# Altium PCB ADC.PcbDoc
Units mil, origin at the board's own origin, x right, y up, seen from the top; angles counter-clockwise.
Board outline 6000 x 4000 mil, 2 copper layers (Top Layer, Bottom Layer); 14 components, 29 nets, 74 pads, 6 vias.
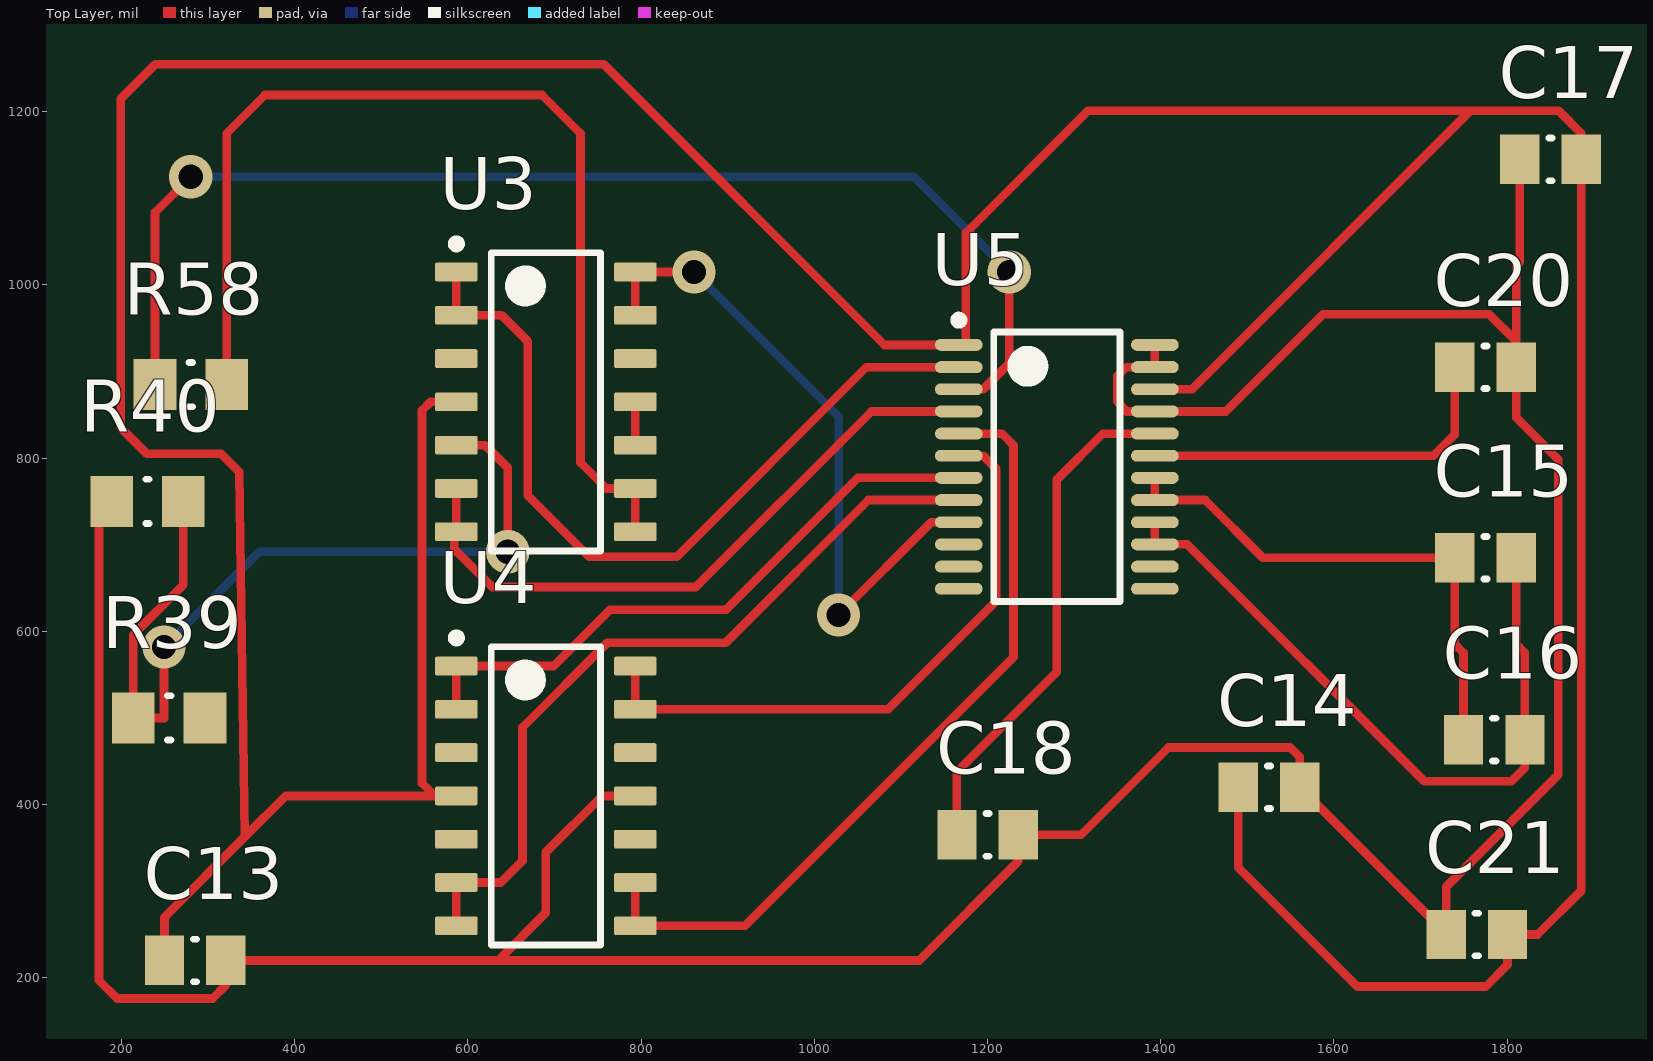
[diagram p0: Top Layer view]
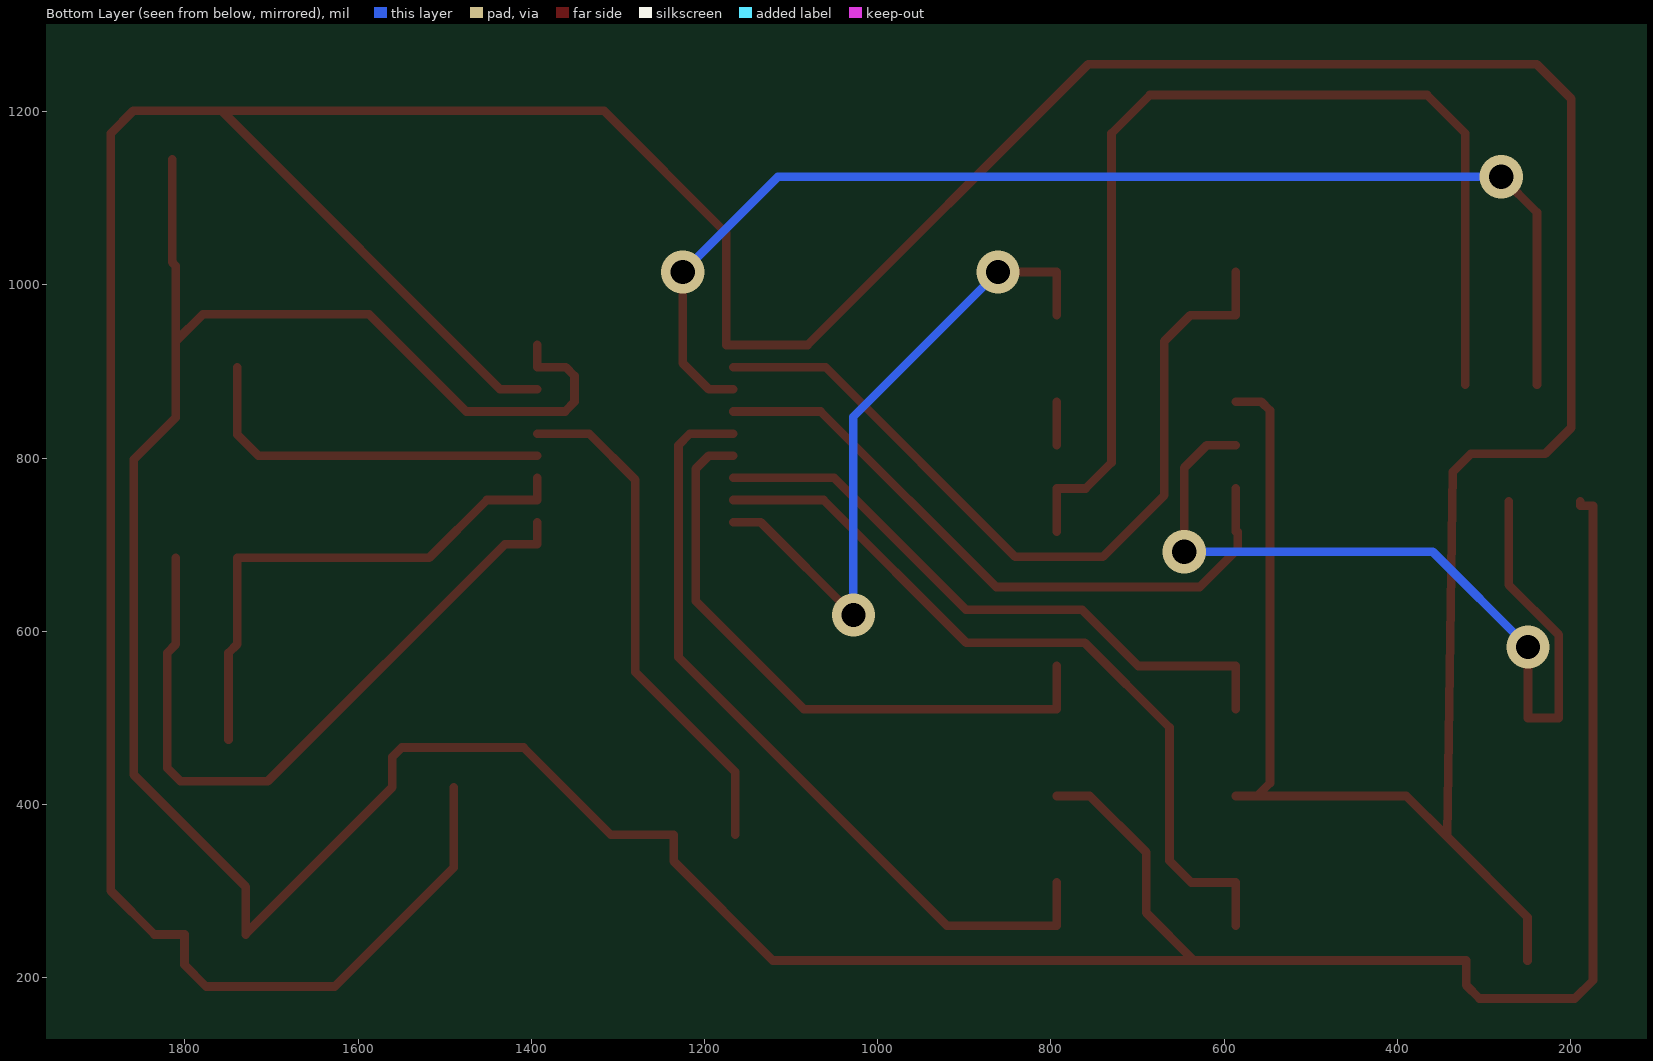
[diagram p1: Bottom Layer view, seen from below]

## Layer stack, top to bottom
Top Solder: solder mask 0.4, Solder Resist, Dk 3.5
Top Layer: signal copper 1.4
Dielectric 1: dielectric 12.6, FR-4, Dk 4.8
Bottom Layer: signal copper 1.4
Bottom Solder: solder mask 0.4, Solder Resist, Dk 3.5

## Board outline
-1525,-1225 4475,-1225 4475,2775 -1525,2775

## Design rules (kind name [scope] priority, off if disabled: settings)
Clearance [All] p1: gap=10 ignorepadtopadclearanceinfootprint=FALSE except(0: Arc-Hole Track-Hole SMDPad-Hole THPad-Hole Via-Hole Fill-Hole Poly-Hole Region-Hole Text-Hole)
PolygonConnect [All] p1: connectstyle=Relief reliefconductorwidth=10 reliefentries=4 polygonreliefangle="90 Angle" airgapwidth=10
RoutingVias [All] p1: holewidth=28 width=50 viastyle="Through Hole" minholewidth=28 minwidth=50 maxholewidth=28 maxwidth=50
SolderMaskExpansion [All] p1: expansion=4
Width [All] p1: maxlimit=10 minlimit=10 preferedwidth=10
30 further rules are at their usual default settings.

## Components (designator, comment, footprint, x,y, rotation, side; value= is the part's Value field where it differs from the comment)
C13 "CAP CER 0.1UF 25V X7R 0805" CAPC0805(2012)145_N 285,220 r0 top
C14 "CAP CER 0.1UF 25V X7R 0805" CAPC0805(2012)145_N 1525,420 r0 top
C15 "CAP CER 0.1UF 25V X7R 0805" CAPC0805(2012)145_N 1775,685 r0 top
C16 "CAP CER 0.1UF 25V X7R 0805" CAPC0805(2012)145_N 1785,475 r0 top
C17 "CAP CER 0.1UF 16V X7R 0805" CAPC0805(2012)145_N 1850,1145 r0 top
C18 "CAP CER 1UF 16V X7R 0805" CAPC0805(2012)145_N 1200,365 r0 top
C20 "CAP CER 0.1UF 16V X7R 0805" CAPC0805(2012)145_N 1775,905 r0 top
C21 "CAP CER 0.1UF 16V X7R 0805" CAPC0805(2012)145_N 1765,250 r0 top
R39 "RES SMD 10K OHM 1% 1/8W 0805" RESC0805(2012)_M 255,500 r0 top
R40 "RES SMD 1K OHM 1% 1/8W 0805" RESC0805(2012)_M 230,750 r0 top
R58 "RES SMD 0.0 OHM JUMPER 1/8W 0805" RESC0805(2012)_M 280,885 r0 top
U3 "OPA4188AIDR" D0014A_L 690,865 r0 top
U4 "OPA4188AIDR" D0014A_L 690,410 r0 top
U5 "MAX1300AEUG" TSOP65P640X90-24N 1280,790 r0 top

## Footprints (in the part's own frame and the unit in brackets; to place one, negate y for a bottom-side part, rotate by r counter-clockwise, add the part's x,y. Pads: shape width x height; smd on the part's side, far side on the other; paste and mask are expansions set on the pad)
CAPC0805(2012)145_N [mm] "Chip Capacitor, Body 2.0x1.2mm, Height 1.45mm, IPC Medium Density"
  rect 1.15x1.45 smd: 1(-0.9,0) 2(0.9,0)
  silkscreen extent -0.05,-0.62 0.05,0.62, body extent -1.1,-0.72 1.1,0.73, height 1.45
D0014A_L [mm] "SOIC, 14-Leads, Body 8.75x4mm, Pitch 1.27mm, IPC High Density"
  rrect18% 1.25x0.55 smd: 1(-2.625,3.81) 2(-2.625,2.54) 3(-2.625,1.27) 4(-2.625,0) 5(-2.625,-1.27) 6(-2.625,-2.54) 7(-2.625,-3.81) 8(2.625,-3.81) 9(2.625,-2.54) 10(2.625,-1.27) 11(2.625,0) 12(2.625,1.27) 13(2.625,2.54) 14(2.625,3.81)
  silkscreen extent -2.75,-4.37 1.6,4.76, body extent -3.02,-4.32 3.02,4.32, height 1.59
RESC0805(2012)_M [mm] "Chip Resistor, Body 2.0x1.3mm, IPC Low Density"
  rect 1.25x1.5 smd: 1(-1.05,0) 2(1.05,0)
  silkscreen extent -0.05,-0.65 0.05,0.65, body extent -1.1,-0.67 1.1,0.67, height 0.7
TSOP65P640X90-24N [mm] "TSOP, 24-Leads, Body 7.80x4.40mm, Pitch 0.65mm, IPC Medium Density"
  oval 1.4x0.35 smd: 1(-2.875,3.575) 2(-2.875,2.925) 3(-2.875,2.275) 4(-2.875,1.625) 5(-2.875,0.975) 6(-2.875,0.325) 7(-2.875,-0.325) 8(-2.875,-0.975) 9(-2.875,-1.625) 10(-2.875,-2.275) 11(-2.875,-2.925) 12(-2.875,-3.575) 13(2.875,-3.575) 14(2.875,-2.925) 15(2.875,-2.275) 16(2.875,-1.625) 17(2.875,-0.975) 18(2.875,-0.325) 19(2.875,0.325) 20(2.875,0.975) 21(2.875,1.625) 22(2.875,2.275) 23(2.875,2.925) 24(2.875,3.575)
  silkscreen extent -3,-3.95 1.85,4.42, body extent -3.2,-3.95 3.2,3.95, height 0.9

## Part data
C13 C14 C15 C16: library part CMP-1036-04795-1, Capacitance=0.1µF, Manufacturer="Murata Electronics North America", Manufacturer Part Number=GRM21BR71E104KA01L, Operating Temperature="-55°C ~ 125°C", Package / Case="0805 (2012 Metric)", Ratings=-, Supplier Part Number 1=490-1673-6-ND, Temperature Coefficient=X7R, Tolerance=±10%, Voltage - Rated=25V, Applications="General Purpose", Category=Capacitors, ComponentLink1Description=http://www.murata.com/~/media/webrenewal/support/library/catalog/products/capacitor/mlcc/c02e.ashx, ComponentLink1URL=http://www.murata.com/~/media/webrenewal/support/library/catalog/products/capacitor/mlcc/c02e.ashx, Features=-, Height - Seated (Max)=-, Lead Spacing=-, Lead Style=-, Mounting Type="Surface Mount, MLCC", Packaging=Digi-Reel®, Part Status=Active, Pricing 1="1=0.2, 10=0.145, 100=0.0683, 500=0.04788, 1000=0.03964 (USD)", RoHS="RoHS Compliant", Size / Dimension="0.079\" L x 0.049\" W (2.00mm x 1.25mm)", Stock 1=891652, Supplier 1=Digi-Key, Thickness (Max)="0.053\" (1.35mm)"
C17 C20 C21: library part CMP-1036-04795-1, Capacitance=0.1µF, Manufacturer="Murata Electronics North America", Manufacturer Part Number=GRM219R71C104KA01D, Operating Temperature="-55°C ~ 125°C", Package / Case="0805 (2012 Metric)", Ratings=-, Supplier Part Number 1=490-1673-6-ND, Temperature Coefficient=X7R, Tolerance=±10%, Voltage - Rated=25V, Applications="General Purpose", Category=Capacitors, ComponentLink1Description=http://www.murata.com/~/media/webrenewal/support/library/catalog/products/capacitor/mlcc/c02e.ashx, ComponentLink1URL=http://www.murata.com/~/media/webrenewal/support/library/catalog/products/capacitor/mlcc/c02e.ashx, Features=-, Height - Seated (Max)=-, Lead Spacing=-, Lead Style=-, Mounting Type="Surface Mount, MLCC", Packaging=Digi-Reel®, Part Status=Active, Pricing 2="1=0.14, 10=0.098, 100=0.0462, 500=0.0324, 1000=0.02683 (USD)", RoHS="RoHS Compliant", Size / Dimension="0.079\" L x 0.049\" W (2.00mm x 1.25mm)", Stock 2=245331, Supplier 2=Digi-Key, Supplier Part Number 2=490-1683-6-ND, Thickness (Max)="0.053\" (1.35mm)"
C18: library part CMP-1036-04795-1, Capacitance=1uF, Case/Package=0805, Case Code (Metric)=2012, Dielectric=X7R, Dielectric Material=Ceramic, Manufacturer=Kemet, Manufacturer Part Number=C0805X105K4RACTU, Max Operating Temperature=125°C, Min Operating Temperature=-55°C, Package Quantity=1, Supplier Part Number 1=399-5329-1-ND, Tolerance=10%, Voltage=16V, Case Code (Imperial)=0805, ComponentLink1Description=https://datasheet.ciiva.com/7842/1698763-7842475.pdf, ComponentLink1URL=https://datasheet.ciiva.com/7842/1698763-7842475.pdf, ComponentLink2Description=https://datasheet.ciiva.com/7842/1698763-7842476.pdf, ComponentLink2URL=https://datasheet.ciiva.com/7842/1698763-7842476.pdf, ComponentLink3Description=https://datasheet.ciiva.com/14593/70096394-14593295.pdf, ComponentLink3URL=https://datasheet.ciiva.com/14593/70096394-14593295.pdf, Depth=1.25mm, Dissipation Factor=3.5%, Height=0.9mm, Length=2.1mm, Mount="Surface Mount", Packaging="Tape and Reel", Pricing 1="1=0.72, 10=0.528, 100=0.3623, 500=0.2868, 1000=0.2415 (USD)", Radiation Hardening=No, REACH SVHC="No SVHC", Stock 1=12821, Supplier 1=Digi-Key, Termination=SMD/SMT, Thickness=0.039inch, Voltage Rating=16V, Voltage Rating (DC)=16V, Width=1.25mm
R39: library part CMP-1013-00017-1, Manufacturer="Vishay Dale", Manufacturer Part Number=CRCW080510K0FKTA, Operating Temperature="-55°C ~ 155°C", Package / Case="0805 (2012 Metric)", Power (Watts)="0.125W, 1/8W", Resistance (Ohms)=10k, Supplier Device Package=0805, Supplier Part Number 1=541-3016-6-ND, Temperature Coefficient=±100ppm/°C, Tolerance=±1%, Category=Resistors, ComponentLink1Description=http://www.vishay.com/docs/20008/dcrcw.pdf, ComponentLink1URL=http://www.vishay.com/docs/20008/dcrcw.pdf, Composition="Thick Film", Failure Rate=-, Features="Automotive AEC-Q200", Height - Seated (Max)="0.020\" (0.50mm)", Packaging=Digi-Reel®, Part Status=Active, Pricing 1="1=0.14, 10=0.129, 100=0.0496, 1000=0.02183, 2500=0.01885 (USD)", RoHS="RoHS non-compliant", Size / Dimension="0.079\" L x 0.049\" W (2.00mm x 1.25mm)", Stock 1=5348, Supplier 1=Digi-Key
R40: library part CMP-1013-00017-1, Manufacturer="Vishay Dale", Manufacturer Part Number=CRCW08051K00FKTA, Operating Temperature="-55°C ~ 155°C", Package / Case="0805 (2012 Metric)", Power (Watts)="0.125W, 1/8W", Resistance (Ohms)=1k, Supplier Device Package=0805, Supplier Part Number 1=541-1.00KAWDKR-ND, Temperature Coefficient=±100ppm/°C, Tolerance=±1%, Category=Resistors, ComponentLink1Description=http://www.vishay.com/docs/20008/dcrcw.pdf, ComponentLink1URL=http://www.vishay.com/docs/20008/dcrcw.pdf, Composition="Thick Film", Failure Rate=-, Features="Automotive AEC-Q200", Height - Seated (Max)="0.020\" (0.50mm)", Packaging=Digi-Reel®, Part Status=Active, Pricing 1="1=0.14, 10=0.129, 100=0.0496, 1000=0.02183, 2500=0.01885 (USD)", RoHS="RoHS non-compliant", Size / Dimension="0.079\" L x 0.049\" W (2.00mm x 1.25mm)", Stock 1=57884, Supplier 1=Digi-Key
R58: library part CMP-1013-00017-1, Manufacturer="Vishay Dale", Manufacturer Part Number=CRCW08050000Z0EA, Operating Temperature="-55°C ~ 155°C", Package / Case="0805 (2012 Metric)", Power (Watts)="0.125W, 1/8W", Resistance (Ohms)=0.0, Supplier Device Package=0805, Supplier Part Number 1=541-0.0ADKR-ND, Temperature Coefficient=-, Tolerance=Jumper, Category=Resistors, ComponentLink1Description=http://www.vishay.com/docs/20035/dcrcwe3.pdf, ComponentLink1URL=http://www.vishay.com/docs/20035/dcrcwe3.pdf, Composition="Thick Film", Failure Rate=-, Features="Automotive AEC-Q200", Height - Seated (Max)="0.020\" (0.50mm)", Packaging=Digi-Reel®, Part Status=Active, Pricing 1="1=0.1, 10=0.026, 25=0.0184, 50=0.014, 100=0.0104, 250=0.00792, 500=0.00634, 1000=0.00466 (USD)", RoHS="RoHS Compliant", Size / Dimension="0.079\" L x 0.049\" W (2.00mm x 1.25mm)", Stock 1=869775, Supplier 1=Digi-Key
U3 U4: library part CMP-0809-00001-2, "0.03 uV/C, Low Noise, Rail-to-Rail Output, Zero-Drift Operational Amplifier, 4 to 36 V, -40 to 125 degC, 14-pin SOIC (D14), Green (RoHS & no Sb/Br)", Manufacturer="Texas Instruments", Rating=Catalog, Total Supply Voltage(Max)(+5V is 5, +/-5V is 10)=36, Total Supply Voltage(Min)(+5V is 5, +/-5V is 10)=4, CMRR(Min)(dB)=120, Code_JEDEC=MS-012, ComponentLink1Description="Manufacturer URL", ComponentLink1URL=http://www.ti.com/, ComponentLink2Description=Datasheet, ComponentLink2URL=http://www.ti.com/lit/ds/symlink/opa4188.pdf, ComponentLink3Description="Package Specification", ComponentLink3URL=http://www.ti.com/lit/ml/mpds177g/mpds177g.pdf, DatasheetVersion=SBOS641B, Eco-Plan="Green (RoHS & no Sb/Br)", GBW(Typ)(MHz)=2, Iq per channel(Max)(mA)=0.475, Mounting Technology="Surface Mount", Number of Channels=4, Offset Drift(Typ)(uV/C)=0.03, PackageDescription="14-Pin Plastic Small Outline, Body 8.65 x 3.9 mm, Pitch 1.27 mm", PackageReference=D0014A, PackageVersion="4040047-5/M, 06/2011", Packing="LARGE T&R", PartId=1, PartNumber=OPA4188AIDR, Slew Rate(Typ)(V/us)=0.8, SubFamily="High Supply Voltage Amplifier (>=30V), Low Noise Amp (<=10nV/rtHz), Low Offset Voltage Amplifier (<=500uV), Low Power Amp (<=500uA), Zero Drift Precision Amplifier"
U5: "IC ADC 16BIT SRL 115KSPS 24TSSOP", Manufacturer 1="Maxim Integrated", Manufacturer Part Number 1=MAX1300AEUG+, Operating Temperature="-40°C ~ 85°C", Package / Case="24-TSSOP (0.173\", 4.40mm Width)", Supplier Device Package=24-TSSOP, Supplier Part Number 1=MAX1300AEUG+-ND, Voltage - Supply, Analog=5V, Architecture=SAR, Category 1="Integrated Circuits (ICs)", ComponentLink1Description=http://datasheets.maximintegrated.com/en/ds/MAX1300-MAX1301.pdf, ComponentLink1URL=http://datasheets.maximintegrated.com/en/ds/MAX1300-MAX1301.pdf, Configuration=MUX-PGA-S/H-ADC, Data Interface=SPI, Description 1="IC ADC 16BIT SRL 115KSPS 24TSSOP", Features=PGA, Input Type="Differential, Single Ended", Number of A/D Converters=1, Number of Bits=16, Number of Inputs="4, 8", Packaging=Tube, Part Status=Active, Pricing 1="1=13.94, 10=13.24, 50=13.16 (USD)", Ratio - S/H:ADC=1:1, Reference Type="External, Internal", RoHS 1="RoHS Compliant", Sampling Rate (Per Second)=115k, Stock 1=1553, Supplier 1=Digi-Key, Supplier 2=Mouser, Supplier Part Number 2=700-MAX1300AEUG+, Voltage - Supply, Digital=5V

## Via types
v1: diameter 50, hole 28, Top Layer to Bottom Layer, 6 vias

## Nets (pads, with @x,y where several pads share a name; then routed paths per layer and width w, separated by ;. In a path a pad name is that pad's centre, name@x,y a point inside that pad or via, vN(x,y) a via of type N, cw(c..) or ccw(c..) an arc to the next point about the centre after c; other vN are vias at no path point)
+3.3: C15.1 C16.1 U5.17 U5.18 | length 613.7
  Top Layer w10: U5.18 U5.17 1451,751.61 1517.61,685 C15.1 1739.57,585 1749.57,575 C16.1
+5: C13.1 C14.1 C17.2 C21.2 U3.4 U4.4 U5.1 U5.22 | length 5918.8
  Top Layer w10: C13.1 249.57,270 342.28,362.72 ; U4.4 562,410 ; U3.4 557,865 547,855 547,425 562,410 ; U5.22 1436,879.57 1757.43,1201 ; C14.1 1489.57,327.43 1627,190 1775.43,190 1800.43,215 C21.2 1835,250 1885.43,300.43 C17.2 1885.43,1175 1859.43,1201 1757.43,1201 ; 342.28,362.72 389.57,410 562,410 ; 342.28,362.72 336,784 315,805 229,805 199,835 199,1215 239,1255 756.75,1255 1081,930.75 U5.1 1175,930.75 1175,1060 1316,1201 1757.43,1201
-5: U3.10 U3.11 | length 50
  Top Layer w10: U3.10 U3.11
AGND: C13.2 C14.2 C17.1 C18.2 C20.2 C21.1 R40.1 U4.11 U5.21 U5.23 U5.24 | length 4272
  Top Layer w10: R40.1 188.66,745 174,745 174,197 195,176 305,176 320.43,191.43 C13.2 635,220 ; U4.11 755,410 690,345 690,275 635,220 ; U5.24 U5.23 1360.16,905.16 1350,895 1350,865 1361.02,853.98 U5.21 1475,853.98 1587.02,966 1779.43,966 1810.43,935 ; C21.1 C21.1@1729.57,250.87 ; C17.1 1814.57,1026.13 1810.43,1022 1810.43,935 ; 635,220 1121,220 1235.43,334.43 C18.2 1308,365 1409,466 1549.43,466 1560.43,455 C14.2 C21.1@1729.57,250.87 ; C21.1@1729.57,250.87 1729.57,305 1859,434.43 1859,798.43 1810.43,847 C20.2 1810.43,935
CH0: U3.1 U3.2 U5.2 | length 940.8
  Top Layer w10: U3.1 U3.2 639,965 669,935 669,757 740,686 841,686 1060.16,905.16 U5.2
CH1: R58.1 U5.3 | length 1423.7
  Top Layer w10: R58.1 238.66,1083.66 v1(280,1125) ; U5.3 1195,879.57 1225,909.57 v1(1225,1015)
  Bottom Layer w10: v1(280,1125) 1115,1125 v1(1225,1015)
CH2: U3.6 U3.7 U5.4 | length 757.4
  Top Layer w10: U3.6 U3.7 584.1,715 584.1,695 627.94,651.16 863.13,651.16 1065.95,853.98 U5.4
DGND: C15.2 C16.2 U5.15 U5.16 | length 819.4
  Top Layer w10: U5.16 U5.15 1430.57,700.43 1704.13,426.87 1805,426.87 1820.43,442.3 C16.2 1820.43,575 1810.43,585 C15.2
NetC18_1: C18.1 U5.20 | length 593.1
  Top Layer w10: C18.1 1164.57,437.57 1280,553 1280,775 1333.39,828.39 U5.20
NetC20_1: C20.1 U5.19 | length 434.2
  Top Layer w10: U5.19 1715,802.8 1739.57,827.36 C20.1
NetR39_1: R39.1 R40.2 U3.5 | length 1000.9
  Top Layer w10: v1(249,582) 249,500 R39.1 213.66,596 271.34,653.68 R40.2 ; U3.5 620,815 646,789 v1(646,692)
  Bottom Layer w10: v1(249,582) 359,692 v1(646,692)
NetR58_2: R58.2 U3.8 U3.9 | length 1241.2
  Top Layer w10: R58.2 321.34,1175 365.68,1219.34 685.66,1219.34 730,1175 730,795 760,765 U3.9 U3.8
NetU3_3: U3.3
NetU3_12: U3.12
NetU4_3: U4.3
NetU4_5: U4.5
NetU4_10: U4.10
NetU4_12: U4.12
NetU5_12: U5.12
SPI0_CS0: U5.10
SPI0_MISO: U5.14
SPI0_MOSI: U5.11
SPI0_SCLK: U5.13
"Thermistor 1": U4.8 U4.9 U5.5 | length 928.8
  Top Layer w10: U4.9 U4.8 920,260 1230,570 1230,815 1216.61,828.39 U5.5
"Thermistor 2": U4.13 U4.14 U5.6 | length 720.6
  Top Layer w10: U4.14 U4.13 1085,510 1210,635 1210,787.8 1195,802.8 U5.6
"Thermistor 3": U4.1 U4.2 U5.7 | length 720.1
  Top Layer w10: U4.2 U4.1 699,560 764,625 898,625 1050.2,777.2 U5.7
"Thermistor 4": U4.6 U4.7 U5.8 | length 903.3
  Top Layer w10: U4.7 U4.6 638,310 663,335 663,489 761,587 897.86,587 1062.47,751.61 U5.8
"Thermistor 5": U3.13 U3.14 U5.9 | length 766
  Top Layer w10: U3.13 U3.14 v1(861,1015) ; v1(1028,619) 1135.02,726.02 U5.9
  Bottom Layer w10: v1(861,1015) 1028,848 v1(1028,619)
ZP: R39.2